# EAGLE board electrical_diagram_pcb (EAGLE 9.7.0)
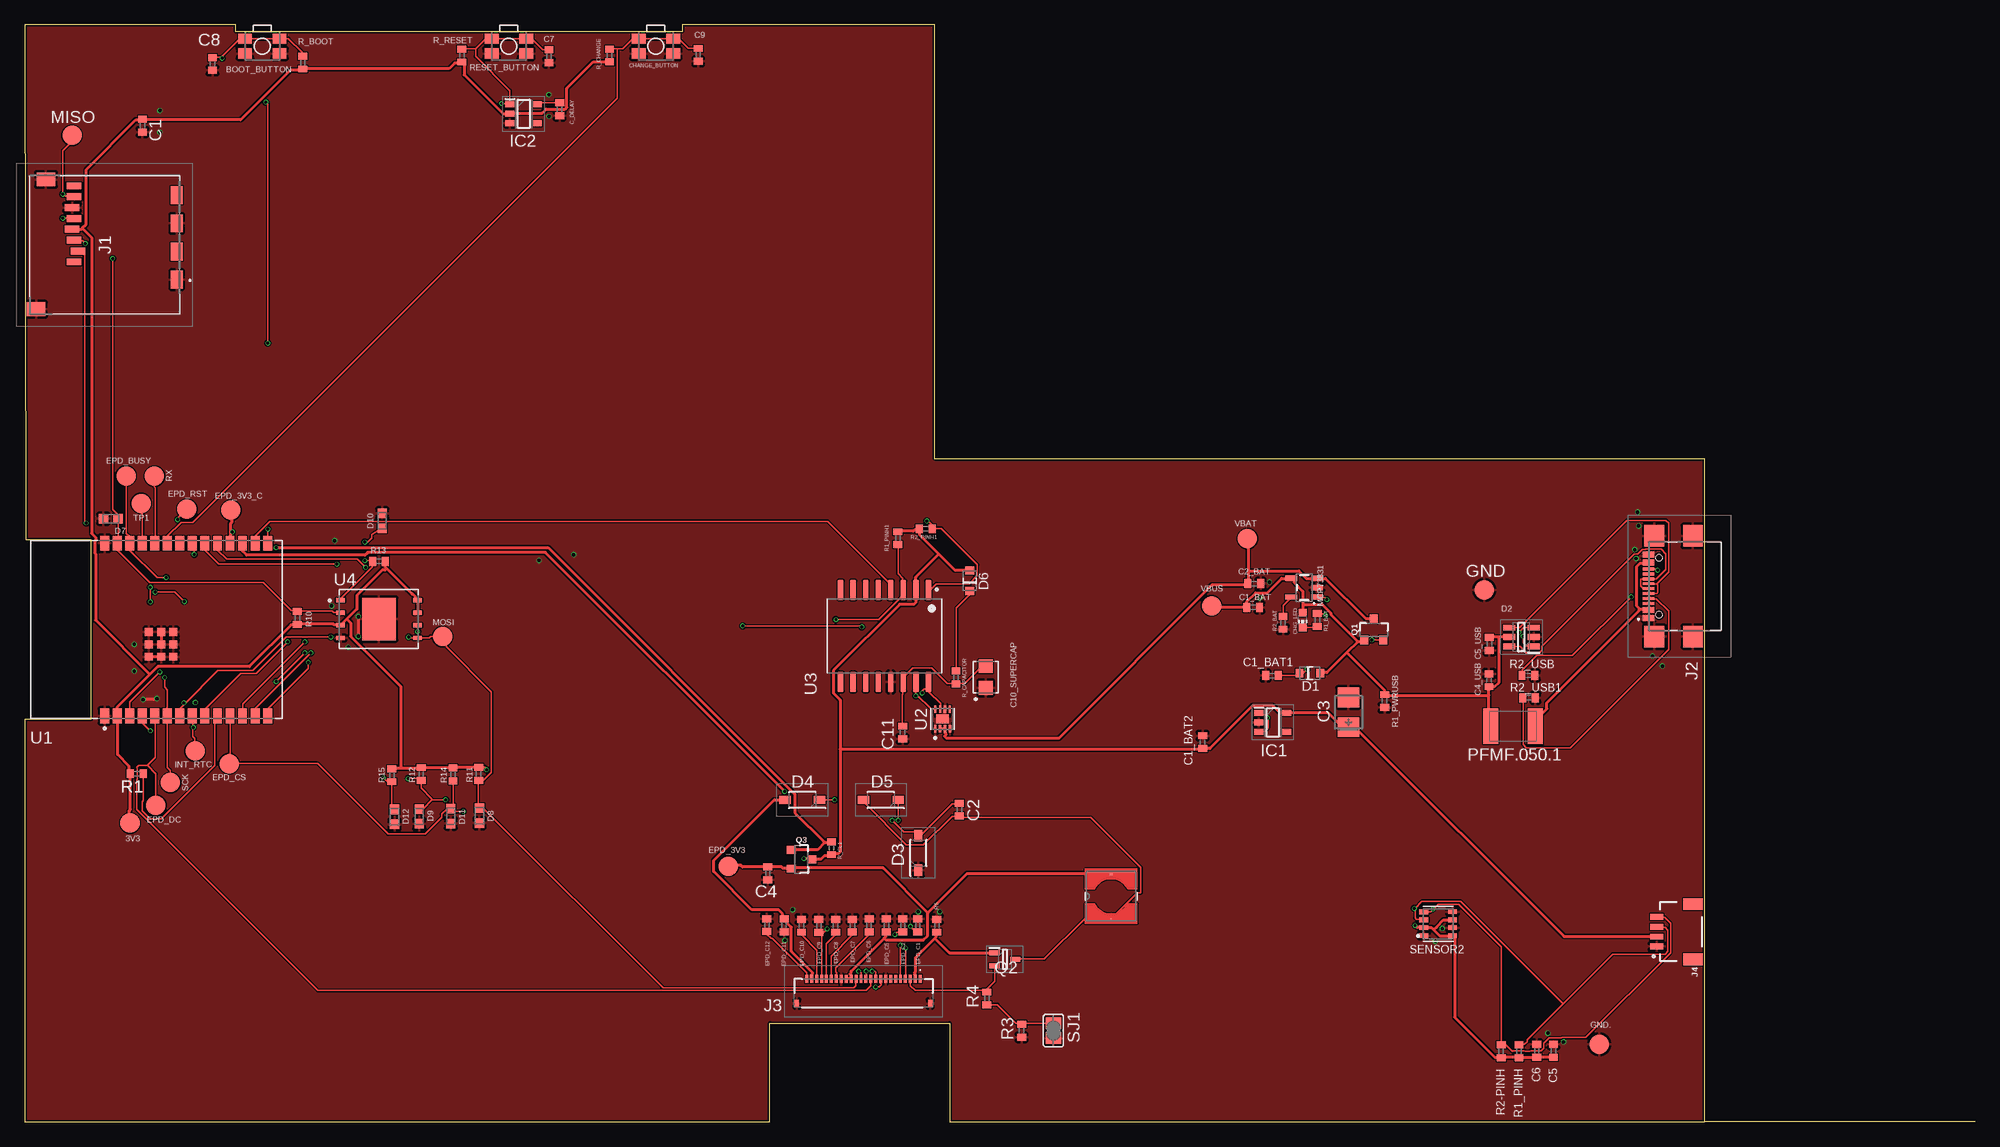
[diagram p0: board, top side]
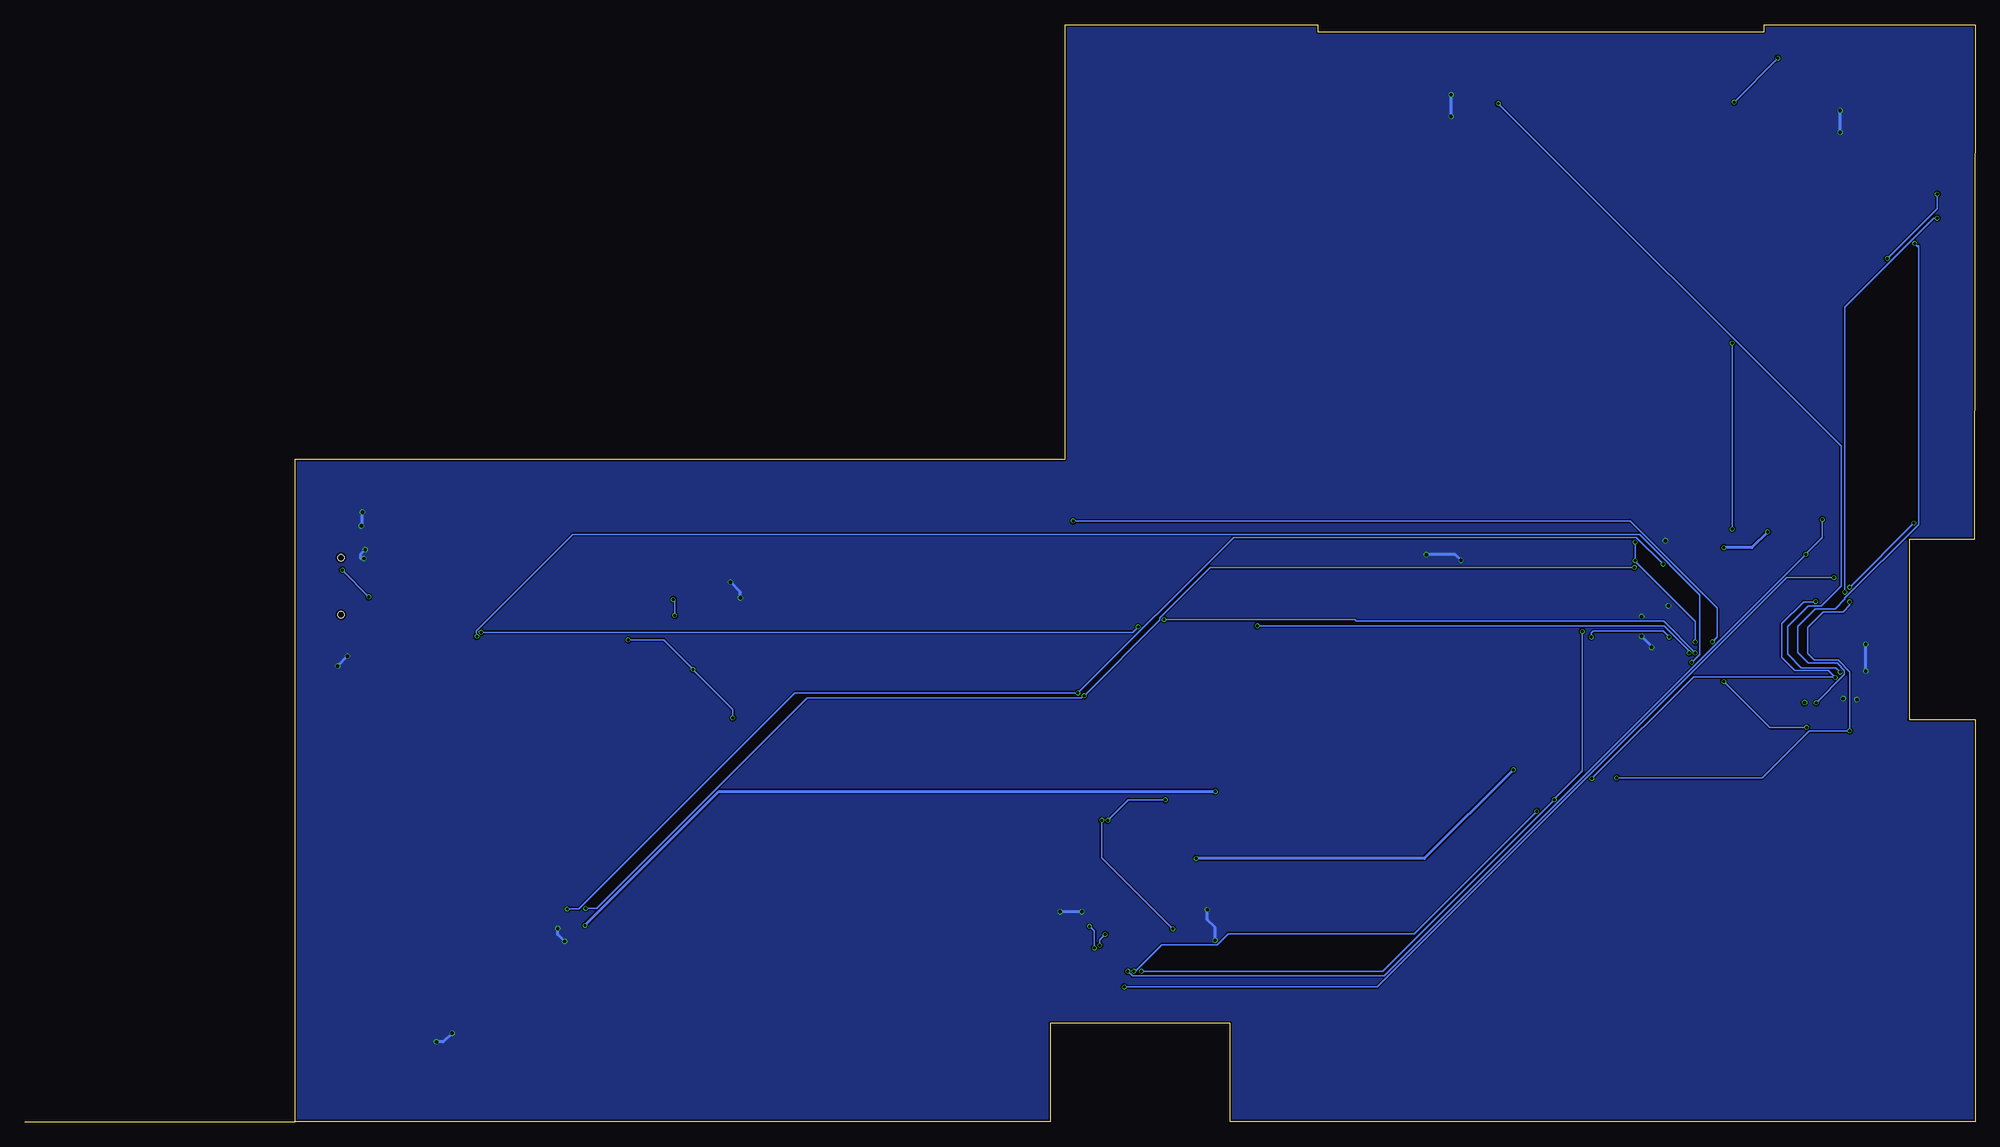
[diagram p1: board, bottom side, seen from below]

Size 197.6 x 111.2 mm. Coordinates in mm from the lower left corner, seen from the top.
Outline: 170.2,0 93.7,0 93.7,10 75.5,10 75.5,0 0,0 0,40.8 6.7,40.8 6.7,59 0.1,59 0,111.2 21.4,111.2 21.4,110.5 66.6,110.5 66.6,111.2 92.2,111.2 92.2,67.2 170.2,67.2 170.2,0
Outline: 197.6,0 170.2,0
Copper layers (1*16): Top 0.035mm / dielectric 1.6mm / Bottom 0.035mm
Design rules "jlcpcb-2layers.dru": minimum track width 0.15mm, minimum drill 0.3mm, track to track 5mil, track to pad 5mil, pad to pad 5mil, via to via 5mil, smd to smd 5mil, copper to edge 0.2mm, drill to drill 6mil, minimum pad ring 10mil, minimum via ring 3mil, stop-mask expansion 4mil, vias tented up to drill 0mil, thermal gap 10mil
Net classes: 1 0.3mm: width 0.3 mm

## Footprints (pad centres in the part's own frame; a part is rotated, then mirrored left to right if it is on the bottom)
TP20R = smd 2 x 2: TP 0,0
MYBUTTON = smd 1.4 x 1.05: 1 1.75,0.75; 2 -1.75,0.75; 3 -1.75,-0.75; 4 1.75,-0.75
EAGLE-LTSPICE_C0402 = smd 0.7 x 0.9: 1 -0.65,0; 2 0.65,0
RCL_CT3528 = smd 2 x 2.2: + -1.5,0; - 1.5,0
ESP32_WROVER_EAGLE-LTSPICE_C0402 = smd 0.7 x 0.9: 1 -0.65,0; 2 0.65,0
CAPCP3225X100N = smd 1.4 x 1.4: 1 -1.1,0; 2 1.1,0
ADAFRUIT_CHIP-LED0603 = smd 0.8 x 0.8: A 0,-0.75; C 0,0.75
ESP32_WROVER_AVX---SD0805S020S1R0_AVX_SD0805S020S1R0_0 = smd 0.8 x 0.9: 1 -1.05,0; 2 1.05,0
SOT95P280X145-6N = smd 1.2 x 0.6: 1 -1.25,0.95; 2 -1.25,0; 3 -1.25,-0.95; 4 1.25,-0.95; 5 1.25,0; 6 1.25,0.95
SOD3716X135N = smd 1.15 x 0.8: 1 -1.75,0; 2 1.75,0
DIOC1608X36N = smd 0.97 x 0.94: 1 -0.75,0; 2 0.75,0
SOT95P280X120-5N = smd 0.9 x 0.6: 1 -1.4,0.95; 2 -1.4,0; 3 -1.4,-0.95; 4 1.4,-0.95; 5 1.4,0.95
SOT95P280X125-5N = smd 0.9 x 0.6: 1 -1.4,0.95; 2 -1.4,0; 3 -1.4,-0.95; 4 1.4,-0.95; 5 1.4,0.95
112ATAARR03ATTEND = smd 1.8 x 1.2: G1 10.6,10.4; G2 4.9,10.4; S1 7.75,10.4; S2 2.05,10.4 | smd 1.4 x 1.9: G3 13.6,-3.85; G4 0.45,-2.85 | smd 0.7 x 1.5: P1 8.8,0; P2 7.7,0.4; P3 6.6,0; P4 5.5,-0.2; P5 4.4,0; P6 3.3,-0.2; P7 2.2,0; P8 1.1,0
SAMACSYS_PARTS_USB4110GFA = smd 0.3 x 1.15: A1 -3.35,3.678; A4 -2.55,3.678; A5 -1.25,3.678; A6 -0.25,3.678; A7 0.25,3.678; A8 1.25,3.678; A9 2.55,3.678; A12 3.35,3.678; B1 3.05,3.678; B4 2.25,3.678; B5 1.75,3.678; B6 0.75,3.678; B7 -0.75,3.678; B8 -1.75,3.678; B9 -2.25,3.678; B12 -3.05,3.678 | smd 2.18 x 2: MP1 -5.11,-0.827; MP2 5.11,-0.827; MP3 -5.11,3.103; MP4 5.11,3.103 | hole 0.65: -2.89,2.603; 2.89,2.603
FH34SRJ24S05SH99 = smd 0.3 x 0.8: 1 5.75,1.45; 2 5.25,1.45; 3 4.75,1.45; 4 4.25,1.45; 5 3.75,1.45; 6 3.25,1.45; 7 2.75,1.45; 8 2.25,1.45; 9 1.75,1.45; 10 1.25,1.45; 11 0.75,1.45; 12 0.25,1.45; 13 -0.25,1.45; 14 -0.75,1.45; 15 -1.25,1.45; 16 -1.75,1.45; 17 -2.25,1.45; 18 -2.75,1.45; 19 -3.25,1.45; 20 -3.75,1.45; 21 -4.25,1.45; 22 -4.75,1.45; 23 -5.25,1.45; 24 -5.75,1.45 | smd 0.4 x 0.8: MP1 6.75,-1.05; MP2 -6.75,-1.05
JST04_1MM_RA = smd 0.6 x 1.35: 1 -1.5,0; 2 -0.5,0; 3 0.5,0; 4 1.5,0 | smd 1.2 x 2: NC1 2.8,-3.675; NC2 -2.8,-3.675
IND_4828-WE-TPC_WRE = smd 0.127 x 0.127: 1 -2.286,0 | smd 0.305 x 0.305: 2 2.286,0
ESP32_WROVER_SPARKFUN-IC-POWER_SOT23-5 = smd 0.55 x 1.2: 1 -0.95,-1.3; 2 0,-1.3; 3 0.95,-1.3; 4 0.95,1.3; 5 -0.95,1.3
ESP32C6_VARISTOR_CT/CN1812 = smd 1.5 x 3.6: 1 -2.25,0; 2 2.25,0
ESP32_WROVER_SPARKFUN-DISCRETESEMI_SOT23-3 = smd 0.8 x 0.9: 1 -0.95,-1; 2 0.95,-1; 3 0,1.1
SOT65P210X110-3N = smd 1.05 x 0.5: 1 -1.05,0.65; 2 -1.05,-0.65; 3 1.05,0
ESP32_WROVER_EAGLE-LTSPICE_R0402 = smd 0.7 x 0.9: 1 -0.65,0; 2 0.65,0
ESP32_WROVER_BME680_PSON80P300X300X100-8N = smd 1.016 x 0.5: 1 1.458,1.2; 2 1.458,0.4; 3 1.458,-0.4; 4 1.458,-1.2; 5 -1.458,-1.22; 6 -1.458,-0.4; 7 -1.458,0.4; 8 -1.458,1.2
SJ = smd 1.168 x 1.6: 1 -0.762,0; 2 0.762,0
XCVR_ESP32-C6-WROOM-1-N8 = smd 1.5 x 0.9: 1 -8.75,5.26; 2 -8.75,3.99; 3 -8.75,2.72; 4 -8.75,1.45; 5 -8.75,0.18; 6 -8.75,-1.09; 7 -8.75,-2.36; 8 -8.75,-3.63; 9 -8.75,-4.9; 10 -8.75,-6.17; 11 -8.75,-7.44; 12 -8.75,-8.71; 13 -8.75,-9.98; 14 -8.75,-11.25; 15 8.75,-11.25; 16 8.75,-9.98; 17 8.75,-8.71; 18 8.75,-7.44; 19 8.75,-6.17; 20 8.75,-4.9; 21 8.75,-3.63; 22 8.75,-2.36; 23 8.75,-1.09; 24 8.75,0.18; 25 8.75,1.45; 26 8.75,2.72; 27 8.75,3.99; 28 8.75,5.26 | smd 0.8 x 0.8: 29_1 -2.755,0.79; 29_2 -1.505,0.79; 29_3 -0.255,0.79; 29_4 -2.755,-0.46; 29_5 -1.505,-0.46; 29_6 -0.255,-0.46; 29_7 -2.755,-1.71; 29_8 -1.505,-1.71; 29_9 -0.255,-1.71
SON50P200X200X80-9N = smd 0.76 x 0.305: 1 -0.985,0.75; 2 -0.985,0.25; 3 -0.985,-0.25; 4 -0.985,-0.75; 6 0.985,-0.25 | smd 0.76 x 0.27: 5 0.985,-0.75; 7 0.985,0.25; 8 0.985,0.75 | smd 0.9 x 1.3: 9 0,0
SOIC127P1032X265-16N = smd 2.05 x 0.59: 1 -4.655,4.445; 2 -4.655,3.175; 3 -4.655,1.905; 4 -4.655,0.635; 5 -4.655,-0.635; 6 -4.655,-1.905; 7 -4.655,-3.175; 8 -4.655,-4.445; 9 4.655,-4.445; 10 4.655,-3.175; 11 4.655,-1.905; 12 4.655,-0.635; 13 4.655,0.635; 14 4.655,1.905; 15 4.655,3.175; 16 4.655,4.445
SON127P600X800X80-9N = smd 0.94 x 0.44: 1 -3.895,1.905; 2 -3.895,0.635; 3 -3.895,-0.635; 4 -3.895,-1.905; 5 3.895,-1.905; 6 3.895,-0.635; 7 3.895,0.635; 8 3.895,1.905 | smd 3.4 x 4.3: 9 0,0

## Placement (x,y rotation side)
3V3  TP  [TP20R]  10.67,30.29 180 top
BOOT_BUTTON  BUTTON_CUSYOMV1  [MYBUTTON]  24.07,109.03 180 top
C1  100nF  [EAGLE-LTSPICE_C0402]  11.93,100.96 270 top
C1_BAT  4.7uF  [EAGLE-LTSPICE_C0402]  124.44,52.15 0 top
C1_BAT1  4.7uF  [EAGLE-LTSPICE_C0402]  126.35,45.23 180 top
C1_BAT2  4.7uF  [EAGLE-LTSPICE_C0402]  119.33,38.49 90 top
C2  4.7uF/25V  [EAGLE-LTSPICE_C0402]  94.69,31.65 270 top
C2_BAT  4.7uF  [EAGLE-LTSPICE_C0402]  124.55,54.55 0 top
C3  100uF TANT  [RCL_CT3528]  134.1,41.51 90 top
C4  10uF  [EAGLE-LTSPICE_C0402]  75.27,25.19 90 top
C4_USB  100nF  [EAGLE-LTSPICE_C0402]  148.33,44.76 90 top
C5  100nF  [ESP32_WROVER_EAGLE-LTSPICE_C0402]  154.87,7.22 90 top
C5_USB  4.7uF  [EAGLE-LTSPICE_C0402]  148.37,48.43 270 top
C6  100nF  [ESP32_WROVER_EAGLE-LTSPICE_C0402]  153.17,7.2 90 top
C7  1uF  [ESP32_WROVER_EAGLE-LTSPICE_C0402]  53.11,108.01 270 top
C8  100nF  [ESP32_WROVER_EAGLE-LTSPICE_C0402]  19.03,107.22 270 top
C9  100nF  [ESP32_WROVER_EAGLE-LTSPICE_C0402]  68.23,108.14 270 top
C10_SUPERCAP  CPH3225A  [CAPCP3225X100N]  97.36,45.09 90 top
C11  100nF  [ESP32_WROVER_EAGLE-LTSPICE_C0402]  88.93,39.46 270 top
C_DELAY  100nF  [ESP32_WROVER_EAGLE-LTSPICE_C0402]  54.19,102.63 270 top
CHANGE_BUTTON  BUTTON_CUSYOMV1  [MYBUTTON]  63.94,109.03 180 top
CHG_LED  LED  [ADAFRUIT_CHIP-LED0603]  129.46,50.85 180 top
D1  ESP32_WROVER_AVX---SD0805S020S1R0_AVX_SD0805S020S1R0_0_0AVX_SD0805S020S1R0_0_0  [ESP32_WROVER_AVX---SD0805S020S1R0_AVX_SD0805S020S1R0_0]  130.19,45.48 0 top
D2  USBLC6-2SC6Y  [SOT95P280X145-6N]  151.62,49.13 180 top
D3  MBR0530  [SOD3716X135N]  90.53,27.26 90 top
D4  MBR0530  [SOD3716X135N]  78.78,32.62 180 top
D5  MBR0530  [SOD3716X135N]  86.74,32.62 180 top
D6  ESP32_WROVER_AVX---SD0805S020S1R0_AVX_SD0805S020S1R0_0_0AVX_SD0805S020S1R0_0_0  [ESP32_WROVER_AVX---SD0805S020S1R0_AVX_SD0805S020S1R0_0]  95.72,54.84 90 top
D7  PGB1010603MR  [DIOC1608X36N]  8.72,61.13 180 top
D8  PGB1010603MR  [DIOC1608X36N]  46.07,31.04 270 top
D9  PGB1010603MR  [DIOC1608X36N]  39.97,30.96 270 top
D10  PGB1010603MR  [DIOC1608X36N]  36.23,60.92 90 top
D11  PGB1010603MR  [DIOC1608X36N]  43.17,31 270 top
D12  PGB1010603MR  [DIOC1608X36N]  37.47,30.92 270 top
EPD_3V3  TP  [TP20R]  71.28,25.91 0 top
EPD_3V3_C  TP  [TP20R]  20.88,62.01 0 top
EPD_BUSY  TP  [TP20R]  10.27,65.46 0 top
EPD_C1  1uF/50V  [EAGLE-LTSPICE_C0402]  90.47,19.92 270 top
EPD_C2  1uF/50V  [EAGLE-LTSPICE_C0402]  88.95,19.92 270 top
EPD_C5  0.1uF/50V  [EAGLE-LTSPICE_C0402]  87.29,19.91 270 top
EPD_C6  1uF/50V  [EAGLE-LTSPICE_C0402]  85.55,19.91 270 top
EPD_C7  1uF/50V  [EAGLE-LTSPICE_C0402]  83.85,19.9 270 top
EPD_C8  1uF/50V  [EAGLE-LTSPICE_C0402]  82.15,19.89 270 top
EPD_C9  1uF/50V  [EAGLE-LTSPICE_C0402]  80.45,19.88 270 top
EPD_C10  1uF/50V  [EAGLE-LTSPICE_C0402]  78.69,19.89 270 top
EPD_C11  1uF/50V  [EAGLE-LTSPICE_C0402]  76.93,19.91 90 top
EPD_C12  1uF/50V  [EAGLE-LTSPICE_C0402]  75.19,19.95 270 top
EPD_CS  TP  [TP20R]  20.72,36.29 180 top
EPD_DC  TP  [TP20R]  13.29,32.09 0 top
EPD_RST  TP  [TP20R]  16.43,62.11 0 top
GND  TP  [TP20R]  147.87,53.89 0 top
GND.  TP  [TP20R]  159.49,7.89 0 top
IC1  XC6220A331MR-G  [SOT95P280X120-5N]  126.43,40.49 0 top
IC2  BD5229G-TR  [SOT95P280X125-5N]  50.55,102.17 0 top
INT_RTC  TP  [TP20R]  17.27,37.59 180 top
J1  112A-TAAR-R03_ATTEND  [112ATAARR03ATTEND]  5,95.96 270 top
J2  SAMACSYS_PARTS_USB4110-GF-A  [SAMACSYS_PARTS_USB4110GFA]  168.17,54.29 90 top
J3  FH34SRJ-24S-0.5SH_99_  [FH34SRJ24S05SH99]  84.97,13.04 0 top
J4  QWIIC_RIGHT_ANGLE  [JST04_1MM_RA]  165.33,19.28 90 top
L1  68uH  [IND_4828-WE-TPC_WRE]  110.05,22.87 90 top
MCP73831  ESP32_WROVER_SPARKFUN-IC-POWER_MCP73831  [ESP32_WROVER_SPARKFUN-IC-POWER_SOT23-5]  129.61,54.15 90 top
MISO  TP  [TP20R]  4.81,99.99 0 top
MOSI  TP  [TP20R]  42.33,49.19 0 top
PFMF.050.1  ESP32C6_VARISTORCN1812  [ESP32C6_VARISTOR_CT/CN1812]  150.76,40.1 180 top
Q1  20V/4.2A/52mΩ/1.4W  [ESP32_WROVER_SPARKFUN-DISCRETESEMI_SOT23-3]  136.66,49.86 0 top
Q2  SI1308EDL-T1-GE3  [SOT65P210X110-3N]  99.29,16.48 0 top
Q3  20V/4.2A/52mΩ/1.4W  [ESP32_WROVER_SPARKFUN-DISCRETESEMI_SOT23-3]  78.66,26.62 270 top
R1  10K  [ESP32_WROVER_EAGLE-LTSPICE_R0402]  11.35,35.29 180 top
R1_BAT  200  [ESP32_WROVER_EAGLE-LTSPICE_R0402]  130.95,50.86 90 top
R1_PINH  10k  [ESP32_WROVER_EAGLE-LTSPICE_R0402]  151.37,7.17 270 top
R1_PINH1  10k  [ESP32_WROVER_EAGLE-LTSPICE_R0402]  88.46,59.16 90 top
R1_PWRUSB  100k  [ESP32_WROVER_EAGLE-LTSPICE_R0402]  137.76,42.65 90 top
R2-PINH  10k  [ESP32_WROVER_EAGLE-LTSPICE_R0402]  149.57,7.15 270 top
R2_BAT  2K  [ESP32_WROVER_EAGLE-LTSPICE_R0402]  127.47,50.58 90 top
R2_PINH1  10k  [ESP32_WROVER_EAGLE-LTSPICE_R0402]  91.29,60.11 180 top
R2_USB  5k1  [ESP32_WROVER_EAGLE-LTSPICE_R0402]  152.33,45.25 0 top
R2_USB1  5k1  [ESP32_WROVER_EAGLE-LTSPICE_R0402]  152.39,42.98 0 top
R3  2.2  [ESP32_WROVER_EAGLE-LTSPICE_R0402]  100.99,9.23 90 top
R4  0.47  [ESP32_WROVER_EAGLE-LTSPICE_R0402]  97.47,12.51 90 top
R5  10k  [ESP32_WROVER_EAGLE-LTSPICE_R0402]  92.41,19.89 270 top
R10  10k  [ESP32_WROVER_EAGLE-LTSPICE_R0402]  27.63,51.07 270 top
R11  10k  [ESP32_WROVER_EAGLE-LTSPICE_R0402]  45.99,35.27 90 top
R12  10k  [ESP32_WROVER_EAGLE-LTSPICE_R0402]  40.17,35.25 90 top
R13  10k  [ESP32_WROVER_EAGLE-LTSPICE_R0402]  35.89,56.81 0 top
R14  10k  [ESP32_WROVER_EAGLE-LTSPICE_R0402]  43.39,35.21 90 top
R15  10k  [ESP32_WROVER_EAGLE-LTSPICE_R0402]  37.19,35.13 90 top
R_BOOT  10k  [ESP32_WROVER_EAGLE-LTSPICE_R0402]  28.17,107.36 270 top
R_CAPACITOR  15  [ESP32_WROVER_EAGLE-LTSPICE_R0402]  94.34,45.05 270 top
R_CHANGE  10k  [ESP32_WROVER_EAGLE-LTSPICE_R0402]  59.24,108.08 270 top
R_CL1  10k  [ESP32_WROVER_EAGLE-LTSPICE_R0402]  81.73,27.74 270 top
R_RESET  10k  [ESP32_WROVER_EAGLE-LTSPICE_R0402]  44.29,108.07 270 top
RESET_BUTTON  BUTTON_CUSYOMV1  [MYBUTTON]  49.05,109.03 180 top
RX  TP  [TP20R]  13.13,65.44 0 top
SCK  TP  [TP20R]  14.75,34.39 0 top
SENSOR2  BME680  [ESP32_WROVER_BME680_PSON80P300X300X100-8N]  143.19,20.08 180 top
SJ1  -  [SJ]  104.21,9.26 90 top
TP1  TP  [TP20R]  11.79,62.69 180 top
U1  ESP32-C6-WROOM-1-N8  [XCVR_ESP32-C6-WROOM-1-N8]  13.36,49.9 90 top
U2  MAX17048G+T10  [SON50P200X200X80-9N]  92.98,40.84 90 top
U3  DS3231SN#  [SOIC127P1032X265-16N]  87.1,49.25 270 top
U4  W25Q512JVEIQ  [SON127P600X800X80-9N]  35.89,50.96 0 top
VBAT  TP  [TP20R]  123.85,59.11 180 top
VBUS  TP  [TP20R]  120.23,52.31 0 top

## Library data of the parts
3V3 BOOT_BUTTON C1 C1_BAT C1_BAT1 C1_BAT2 C2 C2_BAT C4 C4_USB C5_USB CHANGE_BUTTON CHG_LED EPD_3V3 EPD_3V3_C EPD_BUSY EPD_C1 EPD_C2 EPD_C5-EPD_C12 EPD_CS EPD_DC EPD_RST GND GND. INT_RTC MISO MOSI PFMF.050.1 R1 R1_BAT R1_PINH R1_PINH1 R1_PWRUSB R2-PINH R2_BAT R2_PINH1 R2_USB R2_USB1 R3-R5 R10-R15 R_BOOT R_CAPACITOR R_CHANGE R_CL1 R_RESET RESET_BUTTON RX SCK SJ1 TP1 VBAT VBUS = DeskAssistant v19 v1
C3 = DeskAssistant v19 v1; SPICEPREFIX: C
C5-C9 C11 C_DELAY = DeskAssistant v19 v1; SPICEMODEL: NONE; SPICEPREFIX: C
C10_SUPERCAP = DeskAssistant v19 v1; AVAILABILITY: Not in stock; CHECK_PRICES: https://www.snapeda.com/parts/CPH3225A/Seiko+Instruments/view-part/?ref=eda; DESCRIPTION: 11 mF (EDLC) Supercapacitor 3.3 V 1210 (3225 Metric) - -; MF: Seiko Instruments; MP: CPH3225A; PACKAGE: 1210 Seiko; PRICE: None; PURCHASE-URL: https://www.snapeda.com/api/url_track_click_mouser/?unipart_id=562593&manufacturer=Seiko Instruments&part_name=CPH3225A&search_term=None; SNAPEDA_LINK: https://www.snapeda.com/parts/CPH3225A/Seiko+Instruments/view-part/?ref=snap
D1 D6 = DeskAssistant v19 v1; CENTROID_NOT_SPECIFIED: No; DATASHEET: http://datasheets.avx.com/schottky.pdf; DIGIKEY_DESCRIPTION: DIODE SCHOTTKY 20V 1A 0805; DIGIKEY_PART_NUMBER: 478-7800-1-ND; LEAD_FREE: yes; MF: AVX; MOUSER_PART_NUMBER: 581-SD0805S020S1R0; PACKAGE: 0805 (2012 metric); PREFIX: D; ROHS: yes; TEMPERATURE_RANGE_HIGH: +125°C; TEMPERATURE_RANGE_LOW: -55°C
D2 = DeskAssistant v19 v1; AVAILABILITY: In Stock; CHECK_PRICES: https://www.snapeda.com/parts/USBLC6-2SC6Y/STMicroelectronics/view-part/?ref=eda; DESCRIPTION: 17V Clamp 5A (8/20µs) Ipp Tvs Diode Surface Mount SOT-23-6; MF: STMicroelectronics; MP: USBLC6-2SC6Y; PACKAGE: SOT-23-6 STMicroelectronics; PRICE: None; SNAPEDA_LINK: https://www.snapeda.com/parts/USBLC6-2SC6Y/STMicroelectronics/view-part/?ref=snap
D3-D5 = DeskAssistant v19 v1; AVAILABILITY: In Stock; CHECK_PRICES: https://www.snapeda.com/parts/MBR0530/Onsemi/view-part/?ref=eda; DESCRIPTION: Diode Schottky 30 V 500mA Surface Mount SOD-123; MF: ON Semiconductor; MP: MBR0530; PACKAGE: SOD-123-2 ON Semiconductor; PRICE: None; PURCHASE-URL: https://www.snapeda.com/api/url_track_click_mouser/?unipart_id=179458&manufacturer=ON Semiconductor&part_name=MBR0530&search_term=None; SNAPEDA_LINK: https://www.snapeda.com/parts/MBR0530/Onsemi/view-part/?ref=snap
D7-D12 = DeskAssistant v19 v1; AVAILABILITY: In Stock; CHECK_PRICES: https://www.snapeda.com/parts/PGB1010603MR/Littelfuse/view-part/?ref=eda; DESCRIPTION: 150V (Typ) Clamp - Ipp Tvs Diode Surface Mount 0603 (1608 Metric); MF: Littelfuse Inc.; MP: PGB1010603MR; PACKAGE: 0603 Littelfuse Inc.; PRICE: None; PURCHASE-URL: https://www.snapeda.com/api/url_track_click_mouser/?unipart_id=5659453&manufacturer=Littelfuse Inc.&part_name=PGB1010603MR&search_term=None; SNAPEDA_LINK: https://www.snapeda.com/parts/PGB1010603MR/Littelfuse/view-part/?ref=snap
IC1 = DeskAssistant v19 v1; DESCRIPTION: LDO Voltage Regulators; HEIGHT: 1.2mm; MANUFACTURER_NAME: Torex; MANUFACTURER_PART_NUMBER: XC6220A331MR-G; MOUSER_PART_NUMBER: 865-XC6220A331MR-G; MOUSER_PRICE-STOCK: https://www.mouser.co.uk/ProductDetail/Torex-Semiconductor/XC6220A331MR-G?qs=AsjdqWjXhJ8ZSWznL1J0gg%3D%3D
IC2 = DeskAssistant v19 v1; DESCRIPTION: Voltage Detector with Adjustable Delay Time: CMOS processes are utilized to develop high precision, low current consumption CMOS reset ICs that allow arbitrary setting of the delay time. The extensive lineup includes both Nch Open Drain and CMOS output types in a wide range of detection voltages (from 2.3V to 6.0V, in 0.1V steps), enabling selection of the ideal solution based on customer requirements. In addition, the entire series is of course both lead-free and RoHS-compliant.; HEIGHT: 1.25mm; MANUFACTURER_NAME: ROHM Semiconductor; MANUFACTURER_PART_NUMBER: BD5229G-TR; MOUSER_PART_NUMBER: 755-BD5229G-TR; MOUSER_PRICE-STOCK: https://www.mouser.co.uk/ProductDetail/ROHM-Semiconductor/BD5229G-TR?qs=4kLU8WoGk0vvnhrrYwdszw%3D%3D
J1 = DeskAssistant v19 v1; DESCRIPTION: Micro SD Card Socket, Push-Push Type, Top Mount, SMT, H=1.83mm, 10u; HEIGHT: 1.9mm; MANUFACTURER_NAME: ATTEND; MANUFACTURER_PART_NUMBER: 112A-TAAR-R03 ATTEND
J2 = DeskAssistant v19 v1; DESCRIPTION: CONN USB 2.0 TYPE-C R/A SMT; HEIGHT: 3.26mm; MANUFACTURER_NAME: GCT (GLOBAL CONNECTOR TECHNOLOGY); MANUFACTURER_PART_NUMBER: USB4110-GF-A; MOUSER_PART_NUMBER: 640-USB4110-GF-A; MOUSER_PRICE-STOCK: https://www.mouser.co.uk/ProductDetail/GCT/USB4110-GF-A?qs=KUoIvG%2F9IlYiZvIXQjyJeA%3D%3D
J3 = DeskAssistant v19 v1; DESCRIPTION: 24 Position FFC, FPC Connector Contacts, Top and Bottom 0.020" (0.50mm) Surface Mount, Right Angle; HEIGHT: 1.1mm; MANUFACTURER_NAME: Hirose; MANUFACTURER_PART_NUMBER: FH34SRJ-24S-0.5SH(99); MOUSER_PART_NUMBER: 798-FH34SRJ24S05SH99; MOUSER_PRICE-STOCK: https://www.mouser.co.uk/ProductDetail/Hirose-Connector/FH34SRJ-24S-0.5SH99?qs=vcbW%252B4%252BSTIpKBl5ap9J8Fw%3D%3D
J4 = DeskAssistant v19 v1; PROD_ID: CONN-13694
L1 = DeskAssistant v19 v1; COPYRIGHT: Copyright (C) 2024 Ultra Librarian. All rights reserved.; MANUFACTURER_PART_NUMBER: 744043680; MFR_NAME: Wurth Electronics
MCP73831 = DeskAssistant v19 v1; PROD_ID: IC-09995
Q1 Q3 = DeskAssistant v19 v1; PROD_ID: TRAN-14388
Q2 = DeskAssistant v19 v1; AVAILABILITY: In Stock; CHECK_PRICES: https://www.snapeda.com/parts/SI1308EDL-T1-GE3/Vishay+Siliconix/view-part/?ref=eda; DESCRIPTION: Si1308EDL-T1-GE3 N-channel MOSFET Transistor, 1.5 A, 30 V, 3-Pin SC-70 | Siliconix / Vishay SI1308EDL-T1-GE3; MF: Vishay Siliconix; MP: SI1308EDL-T1-GE3; PACKAGE: SOT-323 Vishay Semiconductor; PRICE: None; PURCHASE-URL: https://www.snapeda.com/api/url_track_click_mouser/?unipart_id=274603&manufacturer=Vishay Siliconix&part_name=SI1308EDL-T1-GE3&search_term=None; SNAPEDA_LINK: https://www.snapeda.com/parts/SI1308EDL-T1-GE3/Vishay+Siliconix/view-part/?ref=snap
SENSOR2 = DeskAssistant v19 v1; AVAILABILITY: Unavailable; DESCRIPTION: Integrated Environmental Unit; MF: Bosch Sensortec; MP: BME680; PACKAGE: LGA-8 Bosch Tools; PRICE: None
U1 = DeskAssistant v19 v1; AVAILABILITY: In Stock; CHECK_PRICES: https://www.snapeda.com/parts/ESP32-C6-WROOM-1-N8/Espressif+Systems/view-part/?ref=eda; DESCRIPTION: Multiprotocol Modules ESP32-C6 module, Wi-Fi 6 in 2.4 GHz band, Bluetooth 5, Zigbee 3.0 and Thread. ESP34-WROOM Compatible - ENGINEERING SAMPLE; MF: Espressif Systems; MP: ESP32-C6-WROOM-1-N8; PACKAGE: None; PRICE: None; SNAPEDA_LINK: https://www.snapeda.com/parts/ESP32-C6-WROOM-1-N8/Espressif+Systems/view-part/?ref=snap
U2 = DeskAssistant v19 v1; AVAILABILITY: In Stock; CHECK_PRICES: https://www.snapeda.com/parts/MAX17048G+T10/Analog+Devices/view-part/?ref=eda; DESCRIPTION: 3µA 1-Cell/2-Cell Fuel Gauge with ModelGauge; MF: Analog Devices; MP: MAX17048G+T10; PACKAGE: TDFN-8 Maxim; PRICE: None; PURCHASE-URL: https://www.snapeda.com/api/url_track_click_mouser/?unipart_id=329239&manufacturer=Analog Devices&part_name=MAX17048G+T10&search_term=None; SNAPEDA_LINK: https://www.snapeda.com/parts/MAX17048G+T10/Analog+Devices/view-part/?ref=snap
U3 = DeskAssistant v19 v1; AVAILABILITY: In Stock; CHECK_PRICES: https://www.snapeda.com/parts/DS3231SN%23/Analog+Devices/view-part/?ref=eda; DESCRIPTION: Extremely Accurate I²C-Integrated RTC/TCXO/Crystal; MF: Analog Devices; MP: DS3231SN#; PACKAGE: SOIC-16 Maxim; PRICE: None; PURCHASE-URL: https://www.snapeda.com/api/url_track_click_mouser/?unipart_id=99048&manufacturer=Analog Devices&part_name=DS3231SN#&search_term=None; SNAPEDA_LINK: https://www.snapeda.com/parts/DS3231SN%23/Analog+Devices/view-part/?ref=snap
U4 = DeskAssistant v19 v1; AVAILABILITY: In Stock; CHECK_PRICES: https://www.snapeda.com/parts/W25Q512JVEIQ/Winbond+Electronics/view-part/?ref=eda; DESCRIPTION: FLASH - NOR Memory IC 512Mb (64M x 8) SPI - Quad I/O 133 MHz 8-WSON (8x6); MF: Winbond Electronics; MP: W25Q512JVEIQ; PACKAGE: Package; PRICE: None; SNAPEDA_LINK: https://www.snapeda.com/parts/W25Q512JVEIQ/Winbond+Electronics/view-part/?ref=snap

## Nets
3V3 [0.3mm]: 3V3.TP C1.1 C1_BAT2.1 C3.+ D6.2 IC1.5 IC2.2 J1.P4 J4.2 Q3.3 R1.2 R1_PINH1.2 R2_PINH1.2 R10.2 R11.2 R12.2 R13.2 R14.2 R15.2 R_BOOT.2 R_CHANGE.2 R_CL1.2 R_RESET.2 U1.2 U3.2 U4.3 U4.7 U4.8
32KHZ: R2_PINH1.1 U1.9 U3.1
DN: D2.4 J2.A7 J2.B7
DP: D2.6 J2.A6 J2.B6
EPD_3V3 [0.3mm]: C4.2 EPD_3V3.TP EPD_C5.2 J3.15 J3.16 L1.2 Q3.2
EPD_3V3_C [0.3mm]: EPD_3V3_C.TP Q3.1 R_CL1.1 U1.18
EPD_BUSY: EPD_BUSY.TP J3.9 U1.26
EPD_CS: D11.1 EPD_CS.TP J3.12 R14.1 U1.11
EPD_DC: EPD_DC.TP J3.11 U1.5
EPD_RST: EPD_RST.TP J3.10 U1.21
FLASH_CS: D10.1 R13.1 U1.12 U4.1
GDR [0.3mm]: J3.2 Q2.1 R5.2
GND [0.3mm]: BOOT_BUTTON.1 BOOT_BUTTON.2 C1.2 C1_BAT1.2 C1_BAT2.2 C1_BAT.2 C2_BAT.2 C3.- C4.1 C4_USB.2 C5.2 C5_USB.2 C6.2 C7.2 C8.2 C9.2 C10_SUPERCAP.1 C11.2 C_DELAY.2 CHANGE_BUTTON.1 CHANGE_BUTTON.2 D2.2 D3.1 D7.2 D8.2 D9.2 D10.2 D11.2 D12.2 EPD_C1.1 EPD_C2.1 EPD_C5.1 EPD_C6.1 EPD_C7.1 EPD_C8.1 EPD_C9.1 EPD_C10.1 EPD_C11.1 EPD_C12.1 GND..TP GND.TP IC1.2 IC2.3 J1.G1 J1.G2 J1.G3 J1.G4 J1.P6 J2.A1 J2.A12 J2.B1 J2.B12 J2.MP1 J2.MP2 J2.MP3 J2.MP4 J3.8 J3.17 J3.MP1 J3.MP2 J4.1 MCP73831.2 R1_PWRUSB.1 R2_BAT.1 R2_USB1.2 R2_USB.2 R3.1 R5.1 RESET_BUTTON.1 RESET_BUTTON.2 SENSOR2.1 SENSOR2.5 SENSOR2.7 SJ1.1 U1.1 U1.28 U1.29_1 U1.29_2 U1.29_3 U1.29_4 U1.29_5 U1.29_6 U1.29_7 U1.29_8 U1.29_9 U2.1 U2.4 U2.6 U2.9 U3.13 U4.4 U4.9
GPIO8: R1.1 U1.10
I2C_PW [0.3mm]: C5.1 C6.1 R1_PINH.2 R2-PINH.2 SENSOR2.2 SENSOR2.6 SENSOR2.8 U1.17
INT_RTC: INT_RTC.TP R1_PINH1.1 U1.8 U3.3
IO/BOOT: BOOT_BUTTON.3 BOOT_BUTTON.4 C8.1 R_BOOT.1 U1.15
IO/CHANGE: C9.1 CHANGE_BUTTON.3 CHANGE_BUTTON.4 R_CHANGE.1 U1.23
MISO: D7.1 J1.P7 MISO.TP R10.1 U1.27 U4.2
MOSI: D8.1 J1.P3 J3.14 MOSI.TP R11.1 U1.7 U4.5
N$3: C_DELAY.1 IC2.5
N$4: D6.1 R_CAPACITOR.1
N$7: C1_BAT1.1 D1.1 IC1.1 IC1.3 Q1.2
N$8: J2.B5 R2_USB.1
N$10: J2.A5 R2_USB1.1
N$13: MCP73831.1 R1_BAT.2
N$14: C2.1 D3.2 D4.1
N$15: CHG_LED.C R1_BAT.1
N$16: MCP73831.5 R2_BAT.2
N$18: EPD_C6.2 J3.18
N$19: EPD_C7.2 J3.19
N$20: EPD_C8.2 J3.20
N$21: EPD_C1.2 J3.4
N$22: EPD_C10.2 J3.22
N$23: EPD_C12.2 J3.24
N$24: EPD_C2.2 J3.5
PREVGH: D5.1 EPD_C9.2 J3.21
PREVGL [0.3mm]: D4.2 EPD_C11.2 J3.23
RESE: J3.3 Q2.2 R4.2
RESE': R3.2 R4.1 SJ1.2
RESET: C7.1 IC2.1 R_RESET.1 RESET_BUTTON.3 RESET_BUTTON.4 U1.3
RTC_RST: U1.16 U3.4
RX: RX.TP U1.24
SCK: D9.1 J1.P5 J3.13 R12.1 SCK.TP U1.6 U4.6
SCL: J4.4 R2-PINH.1 SENSOR2.4 U1.20 U2.7 U3.16
SDA: J4.3 R1_PINH.1 SENSOR2.3 U1.19 U2.8 U3.15
SRC: C2.2 D5.2 L1.1 Q2.3
SS_SD: D12.1 J1.P2 R15.1 U1.4
TX: TP1.TP U1.25
USB_D+: D2.1 U1.14
USB_D-: D2.3 U1.13
VBAT [0.3mm]: C2_BAT.1 MCP73831.3 Q1.3 U2.2 U2.3 VBAT.TP
VBUS [0.3mm]: C1_BAT.1 C4_USB.1 C5_USB.1 CHG_LED.A D1.2 D2.5 MCP73831.4 PFMF.050.1.2 Q1.1 R1_PWRUSB.2 VBUS.TP
VRTC: C10_SUPERCAP.2 C11.1 R_CAPACITOR.2 U3.14
VUSB [0.3mm]: J2.A4 J2.A9 J2.B4 J2.B9 PFMF.050.1.1

## Tracks (layer width: path | path; a pad name or v marks a point on that pad's centre or on a via)
3V3  (via drill 0.3)
  Top 0.3: R1_PINH1.2 88.49,59.86 90.01,59.86 90.15,60 90.56,60 90.63,60.07 R2_PINH1.2 90.7,59.93 90.7,59.86 90.63,59.79 90.63,59.52 92.61,57.54 | 92.61,57.54 94.23,55.92 95.69,55.92 D6.2 | 82.6,37.77 82.6,42.76 81.91,43.45 81.91,45.74 88.63,52.45 90.08,52.45 90.29,52.66 90.29,53.84 U3.2 90.29,54.05 90.29,55.22 92.61,57.54 | 82.6,37.77 82.6,27.39 82.39,27.18 81.84,27.18 R_CL1.2 81.7,27.04 81.63,26.97 81.01,26.97 80.66,26.62 Q3.3 79.62,26.69 v78.93,26.69 | J4.2 165.29,18.8 155.94,18.8 134.75,39.99 134.12,39.99 C3.+ 133.98,40.06 133.43,40.06 132.05,41.44 127.96,41.44 IC1.5 127.2,41.44 126.44,42.2 124.43,42.2 120.06,37.84 119.37,37.84 C1_BAT2.1 119.23,37.77 82.6,37.77 | 3V3.TP 10.65,30.29 10.65,31.19 10.58,31.26 10.58,31.54 10.72,31.68 10.72,35.28 R1.2 10.58,35.35 10.58,36.04 9.4,37.22 9.4,41.1 U1.2 9.33,41.3 9.33,42 12.69,45.36 | 38.07,35.83 40.15,35.83 R12.2 40.29,35.9 43.27,35.9 R14.2 43.4,35.9 45.97,35.9 R11.2 46.11,35.9 46.59,35.9 v46.8,35.7 | 38.07,35.83 37.24,35.83 R15.2 | 36.65,56.09 39.25,53.49 39.32,53.49 39.6,53.22 39.6,52.94 39.73,52.8 U4.8 39.8,52.66 39.8,51.62 U4.7 | 36.65,56.09 36.55,56.19 36.55,56.75 R13.2 | 32.64,50.97 33.64,51.97 33.64,53.35 36.2,55.92 36.48,55.92 36.65,56.09 | 32.64,50.97 32.12,50.45 U4.3 31.98,50.38 31.36,50.38 31.29,50.45 27.69,50.45 R10.2 27.55,50.38 26.99,50.38 22.77,46.15 13.49,46.15 12.69,45.36 | 38.07,35.83 38.07,44.14 33.02,49.2 33.02,50.58 32.64,50.97 | 5.84,90.58 5.73,90.47 4.83,90.47 J1.P4 | 5.84,90.58 6.22,90.96 6.22,96.5 11.27,101.55 11.9,101.55 C1.1 12.04,101.55 21.87,101.55 26.92,106.61 28.1,106.61 R_BOOT.2 28.17,106.75 42.99,106.75 43.54,107.3 44.17,107.3 44.24,107.37 R_RESET.2 44.38,107.3 44.51,107.16 44.51,106.12 48.46,102.18 49.08,102.18 IC2.2 49.22,102.24 52.41,102.24 52.82,102.65 54.75,102.65 54.92,102.81 54.92,104.75 57.6,107.44 59.19,107.44 R_CHANGE.2
  Top 0.3: 12.69,45.36 7.19,50.86 7.19,57.58 7.12,57.65 7.12,58.89 7.19,58.96 7.19,59.24 6.77,59.66 6.77,89.64 5.84,90.58
  Bottom 0.3: v78.93,26.69 55.8,26.69 v46.8,35.7
32KHZ  (via drill 0.3)
  Top 0.15: U3.1 91.6,53.91 91.74,53.91 92.36,54.53 95.69,54.53 96.52,55.36 96.52,56.47 92.85,60.14 91.95,60.14 R2_PINH1.1 91.95,60.21 91.95,60.49 91.53,60.9 v91.4,60.9 | v26.65,48.65 23.46,45.46 21.87,45.46 18.27,41.86 18.27,41.17 U1.9
  Bottom 0.15: v26.65,48.65 26.15,49.15 26.15,52.09 34.96,60.9 v91.4,60.9
DN
  Top 0.15: 165.32,54.5 165.29,54.53 164.52,54.53 J2.A7 | 165.32,54.5 165.42,54.39 165.42,53.63 165.35,53.56 164.52,53.56 J2.B7 | 165.32,54.5 166.53,55.71 166.53,60.69 166.26,60.97 162.31,60.97 151.44,50.1 150.4,50.1 D2.4
DP
  Top 0.15: J2.A6 164.45,54.05 163.97,54.05 163.69,54.32 163.69,54.95 163.76,55.02 164.45,55.02 J2.B6 164.52,55.02 165.29,55.02 166.26,55.99 166.26,57.58 165.77,58.06 164.23,58.06 164.16,57.99 163.84,57.99 163.4,57.55 163.05,57.55 153.67,48.17 153.67,47.8 153.41,47.54 152.13,47.54 151.5,48.16 150.4,48.16 D2.6
EPD_3V3
  Top 0.3: EPD_3V3.TP 71.31,25.93 71.38,26 72.56,26 72.72,25.84 C4.2 75.29,25.86 76.64,25.86 76.78,25.72 77.61,25.72 Q3.2 77.75,25.72 86.96,25.72 91.5,21.19 | J3.16 83.22,14.51 83.71,14.51 J3.15 83.71,14.64 83.71,14.85 83.64,14.92 83.64,15.06 83.71,15.13 83.71,15.27 87.07,18.62 | 87.07,18.62 87.24,18.8 87.24,19.21 EPD_C5.2 | 91.5,21.19 91.47,21.15 91.47,18.87 91.05,18.45 87.24,18.45 87.07,18.62 | 91.5,21.19 95.48,25.17 110.02,25.17 L1.2
EPD_3V3_C  (via drill 0.3)
  Top 0.3: 81.01,28.29 80.32,27.59 77.68,27.59 Q3.1 | 81.01,28.29 81.63,28.29 81.7,28.36 R_CL1.1 | 20.83,59.79 20.83,60.62 20.97,60.76 20.97,61.04 20.9,61.11 20.9,61.94 EPD_3V3_C.TP | 20.83,59.79 20.83,58.69 U1.18 | v25.47,58.2 53.03,58.2 78.03,33.2 78.03,31.33 80.94,28.42 81.01,28.29 | v21.04,59.79 20.83,59.79
  Bottom 0.3: v25.47,58.2 22.63,58.2 v21.04,59.79
EPD_BUSY  (via drill 0.3)
  Top 0.15: v86.2,13.67 86.55,13.67 86.76,13.88 86.76,14.02 86.69,14.09 86.69,14.44 J3.9 | EPD_BUSY.TP 10.3,65.4 10.3,59.66 10.58,59.38 10.58,58.69 U1.26 10.65,58.62 10.65,57.93 13.42,55.16 v14.32,55.16
  Bottom 0.15: v86.2,13.67 60.58,13.67 19.1,55.16 v14.32,55.16
EPD_CS  (via drill 0.3)
  Top 0.15: U1.11 20.83,41.1 20.83,37.36 20.69,37.22 20.69,36.32 EPD_CS.TP 20.76,36.32 29.69,36.32 36.83,29.19 40.57,29.19 42.23,30.85 42.23,31.19 42.78,31.75 43.13,31.75 D11.1 | v85.23,15.27 85.23,14.51 J3.12 | v44.44,31.47 43.47,31.47 43.2,31.75 D11.1 | R14.1 43.4,34.52 43.4,32.02 43.2,31.82 D11.1
  Bottom 0.15: v85.23,15.27 85.09,15.27 82.41,17.95 76.81,17.95 75.68,19.08 56.84,19.08 v44.44,31.47
EPD_DC
  Top 0.15: 12.45,36.11 11.55,36.11 11.34,35.9 11.41,35.83 11.41,34.73 11.34,34.66 11.34,31.68 29.69,13.33 85.23,13.33 85.72,13.81 85.72,14.44 J3.11 | 12.45,36.11 13.28,35.28 EPD_DC.TP | U1.5 13.21,41.1 13.21,36.94 12.45,36.18 12.45,36.11
EPD_RST  (via drill 0.3)
  Top 0.15: v85.86,15.27 86.13,15.27 86.2,15.2 86.2,14.51 J3.10 | v17.16,57.51 17.16,58.48 17.02,58.62 U1.21 | v15.5,61.04 15.5,61.18 16.4,62.08 EPD_RST.TP
  Bottom 0.15: v85.86,15.27 85.37,14.78 59.89,14.78 v17.16,57.51 17.16,57.58 15.5,59.24 v15.5,61.04
FLASH_CS  (via drill 0.3)
  Top 0.15: U4.1 32.05,52.87 32.05,53.08 35.23,56.26 35.23,56.75 R13.1 35.23,56.89 v34.47,56.89 | v34.47,58.76 34.75,58.76 35.16,59.17 35.16,59.52 D10.1 | v28.38,48.65 22.08,42.34 22.08,41.17 U1.12
  Bottom 0.15: v34.47,58.76 v34.47,56.89 34.47,56.82 28.38,50.72 v28.38,48.65
GDR
  Top 0.3: 92.19,18.62 92.3,18.73 92.3,19.15 92.36,19.21 R5.2 | 92.19,18.62 90.22,16.65 90.22,15.2 90.15,15.13 90.15,14.92 90.22,14.85 90.22,14.51 J3.2 | 92.19,18.62 93.68,17.14 98.18,17.14 Q2.1
GND  (via drill 0.35)
  Top 0.3: U1.29_5 13.84,48.44 13.84,49.62 U1.29_6 | 154.3,8.98 v154.3,9 | v33.8,51.2 v33.8,49.2 | U1.29_4 U1.29_1 | J2.A12 J2.B1 | v12,42.8 13.3,42.8 v13.4,42.9
  Bottom 0.3: v154.3,9 155.2,8.1 v155.9,8.1 | v90.5,21.3 v92.7,21.3 | v77,18.4 77,19.7 77.8,20.5 v77.8,21.5 | v125.1,53.1 125.1,53.7 v126.1,54.7 | v164.9,47.2 v165.9,46.2 | v142.9,18.3 143.6,19 v143.6,19.6 | v11.1,45.7 v11.1,48.4 | v33.8,49.2 32.8,48.2 v32.8,48.1 | v53.1,101.9 v53.1,104.1 | v13.7,100.3 v13.7,102.5 | v163.5,60.4 163.4,60.5 v163.4,61.8 | v163.24,57.1 163.6,57.1 163.6,57.5 v163.1,58 v163.1,58.01 | v52.1,56.9 52.7,57.5 v55.6,57.5
  other vias: 31.1,52.3 31.4,58.9
  pour Top: 6.76,40.76 6.74,40.74 6.72,40.72 0.18,40.72 0.18,0.18 75.32,0.18 75.32,10.12 75.34,10.14 75.36,10.16 75.38,10.18 93.82,10.18 93.84,10.16 93.86,10.14 93.88,10.12 93.88,0.18 170.02,0.18 170.02,67.02 92.08,67.02 92.06,67.04 92.04,67.06 92.02,67.08 92.02,111.02 66.78,111.02 66.78,110.38 66.76,110.36 66.74,110.34 66.72,110.32 21.28,110.32 21.26,110.34 21.24,110.36 21.22,110.38 21.22,111.02 0.08,111.02 0.08,59.08 6.72,59.08 6.74,59.06 6.76,59.04 6.78,59.02 6.78,40.78
  pour Bottom: 6.76,40.76 6.74,40.74 6.72,40.72 0.18,40.72 0.18,0.18 75.32,0.18 75.32,10.12 75.34,10.14 75.36,10.16 75.38,10.18 93.82,10.18 93.84,10.16 93.86,10.14 93.88,10.12 93.88,0.18 170.02,0.18 170.02,67.02 92.08,67.02 92.06,67.04 92.04,67.06 92.02,67.08 92.02,111.02 66.78,111.02 66.78,110.38 66.76,110.36 66.74,110.34 66.72,110.32 21.28,110.32 21.26,110.34 21.24,110.36 21.22,110.38 21.22,111.02 0.08,111.02 0.08,59.08 6.72,59.08 6.74,59.06 6.76,59.04 6.78,59.02 6.78,40.78
GPIO8
  Top 0.15: R1.1 12.04,35.28 12.04,32.58 11.9,32.44 11.9,31.54 12.73,30.71 13.84,30.71 19.24,36.11 19.24,40.82 19.51,41.1 U1.10
I2C_PW  (via drill 0.3)
  Top 0.3: C5.1 154.83,6.54 153.24,6.54 C6.1 153.03,6.54 151.5,6.54 R1_PINH.2 151.37,6.54 149.64,6.54 R2-PINH.2 149.43,6.54 148.94,6.54 144.86,10.63 144.86,18.8 144.79,18.87 SENSOR2.8 144.58,18.87 143.33,18.87 142.74,19.46 | 142.74,19.46 142.5,19.7 141.74,19.7 SENSOR2.2 141.6,19.7 141.12,19.7 141.05,19.77 140.98,19.77 v140.84,19.91 | SENSOR2.6 144.58,20.46 143.71,20.46 143.07,19.82 143.07,19.78 142.74,19.46 | v76.99,33.48 52.75,57.72 34.75,57.72 34.47,57.44 22.49,57.44 22.08,57.86 22.08,58.62 U1.17
  Bottom 0.3: v76.99,33.48 127.27,33.48 v140.84,19.91
INT_RTC  (via drill 0.3)
  Top 0.15: 17.02,39.99 17.02,39.09 17.23,38.88 17.23,37.63 INT_RTC.TP | 17.02,39.99 17.02,41.1 U1.8 | R1_PINH1.1 88.49,58.48 88.49,55.57 88.97,55.09 88.97,53.91 U3.3 88.97,53.84 88.97,53.35 86.51,50.9 v82.19,50.9 | v28.38,47.54 v25.47,44.63 | v17.09,39.99 17.02,39.99
  Bottom 0.15: v17.09,39.99 20.83,39.99 v25.47,44.63 | v82.19,50.9 62.85,50.9 62.7,50.75 31.59,50.75 v28.38,47.54
IO/BOOT  (via drill 0.3)
  Top 0.15: R_BOOT.1 28.1,108.06 28.1,108.41 26.72,109.79 25.89,109.79 BOOT_BUTTON.3 25.75,109.79 22.35,109.79 BOOT_BUTTON.4 22.28,109.72 21.73,109.72 19.93,107.92 | 19.93,107.92 19.1,107.92 C8.1 | v24.64,60.07 24.64,58.69 U1.15 | v24.64,78.91 24.64,103.15 v24.43,103.35 | v20,107.78 19.93,107.85 19.93,107.92
  Bottom 0.15: v24.64,78.91 v24.64,60.07 | v20,107.78 v24.43,103.35
IO/CHANGE
  Top 0.15: C9.1 68.2,108.82 67.23,108.82 66.33,109.72 65.7,109.72 CHANGE_BUTTON.3 65.63,109.79 62.24,109.79 CHANGE_BUTTON.4 62.17,109.72 61.55,109.72 60.58,108.75 60.02,108.75 | 60.02,108.75 59.26,108.75 R_CHANGE.1 | 60.02,108.75 60.02,103.77 17.02,60.76 15.84,60.76 14.46,59.38 14.46,58.69 U1.23
MISO  (via drill 0.3)
  Top 0.15: 3.9,94.04 3.86,94.07 3.86,98.44 4.76,99.34 4.76,99.96 MISO.TP | 3.9,94.04 4.14,93.8 4.97,93.8 J1.P7 | U4.2 31.98,51.62 31.29,51.62 31.15,51.76 27.69,51.76 R10.1 27.69,51.83 26.99,51.83 24.15,54.67 12.66,54.67 9.4,57.93 9.4,58.62 U1.27 9.4,58.69 9.47,58.76 9.47,61.11 D7.1 9.47,61.18 9.47,61.52 8.92,62.08 v8.92,87.49 | v3.86,94 3.9,94.04
  Bottom 0.15: v3.86,94 3.86,92.55 v8.92,87.49
MOSI  (via drill 0.3)
  Top 0.15: J3.14 84.19,14.44 84.19,13.81 83.99,13.61 64.66,13.61 46.52,31.75 46.11,31.75 D8.1 46.04,31.82 45.97,31.89 45.97,34.59 R11.1 46.04,34.66 46.52,34.66 47.28,35.42 47.28,43.59 42.71,48.16 42.71,48.78 42.37,49.13 MOSI.TP 42.3,49.2 41.12,49.2 40.98,49.06 39.8,49.06 U4.5 39.73,49.06 39.11,49.06 39.04,49.13 v38.9,49.13 | 16.23,42.38 19.58,45.74 23.12,45.74 26.51,49.13 v31.01,49.13 | 16.23,42.38 15.77,41.93 15.77,41.17 U1.7 | v6.15,89.02 5.87,89.29 5.04,89.29 J1.P3 | 16.23,42.38 v16.12,42.48
  Bottom 0.15: v38.9,49.13 38.9,49.53 38.7,49.73 31.61,49.73 v31.01,49.13 | v6.15,89.02 5.84,88.71 5.73,88.82 5.73,60.56 13.21,53.08 13.21,52.99 14.2,52 16.2,52 18,50.2 18,47.6 16.9,46.5 13.99,46.5 13.27,45.78 13.27,45.33 v16.12,42.48
N$1  (via drill 0.35)
  other vias: 17.3,42.5
N$3
  Top 0.15: 51.99,103.15 IC2.5 52.11,103.28 C_DELAY.1
N$4
  Top 0.15: R_CAPACITOR.1 94.37,45.74 94.37,52.11 95.69,53.42 95.69,53.77 D6.1
N$7  (via drill 0.3)
  Top 0.15: 125.95,40.96 125.95,41.03 125.67,41.3 125.12,41.3 125.05,41.37 IC1.1 | 125.95,40.96 125.95,39.92 125.61,39.57 125.05,39.57 IC1.3 | C1_BAT1.1 127.06,45.25 128.93,45.25 129.14,45.46 D1.1 129.21,45.46 129.48,45.46 v129.9,45.88 | v136.48,48.85 137.59,48.85 Q1.2 | v125.88,40.96 125.95,40.96
  Bottom 0.15: v136.48,48.85 132.88,48.85 v129.9,45.88 129.9,45.81 125.88,41.79 v125.88,40.96
N$8  (via drill 0.3)
  Top 0.15: v162.72,53.22 156.77,47.26 153.17,47.26 151.71,45.81 151.71,45.25 R2_USB.1 | v165.42,55.92 165.29,56.05 164.52,56.05 J2.B5
  Bottom 0.15: v165.42,55.92 v162.72,53.22
N$10
  Top 0.15: R2_USB1.1 151.78,42.97 151.78,38.26 152.13,37.91 156.56,37.91 166.53,47.88 166.53,51.76 165.29,53.01 164.52,53.01 J2.A5
N$13  (via drill 0.3)
  Top 0.15: v131.77,51.35 131.63,51.48 131.01,51.48 R1_BAT.2 | v131.91,52.94 131.7,53.15 130.94,53.15 MCP73831.1
  Bottom 0.15: v131.77,51.35 131.77,52.8 v131.91,52.94
N$14  (via drill 0.3)
  Top 0.15: C2.1 94.65,32.23 93.96,32.23 90.77,29.05 90.56,29.05 D3.2 90.49,29.05 90.15,29.39 89.04,29.39 v87.86,30.57 | v82.05,32.65 80.59,32.65 D4.1
  Bottom 0.15: v82.05,32.65 85.79,32.65 v87.86,30.57
N$15
  Top 0.15: CHG_LED.C 129.48,50.1 130.87,50.1 130.94,50.17 R1_BAT.1
N$16
  Top 0.15: R2_BAT.2 127.48,51.28 127.48,52.31 128.31,53.15 MCP73831.5
N$18
  Top 0.15: J3.18 82.19,14.51 82.19,14.92 82.25,14.99 82.25,15.13 82.19,15.2 82.19,15.61 85.51,18.94 85.51,19.21 EPD_C6.2
N$19
  Top 0.15: J3.19 81.7,14.51 81.7,16.79 83.85,18.94 83.85,19.21 EPD_C7.2
N$20
  Top 0.15: J3.20 81.22,14.51 81.22,18.04 82.12,18.94 82.12,19.21 EPD_C8.2
N$21  (via drill 0.3)
  Top 0.15: v89.25,17.62 89.25,14.51 J3.4 | v89.73,19.84 90.29,19.28 90.43,19.28 EPD_C1.2
  Bottom 0.15: v89.25,17.62 89.25,19.35 v89.73,19.84
N$22
  Top 0.15: J3.22 80.25,14.51 80.25,17.41 78.72,18.94 78.72,19.21 EPD_C10.2
N$23
  Top 0.15: J3.24 79.21,14.51 79.21,15.13 75.74,18.59 75.61,18.59 75.19,19.01 75.19,19.28 EPD_C12.2
N$24  (via drill 0.3)
  Top 0.15: v88.69,17.9 88.69,14.51 J3.5 | v88.14,19.01 88.35,19.21 88.9,19.21 EPD_C2.2
  Bottom 0.15: v88.69,17.9 88.69,18.45 v88.14,19.01
PREVGH  (via drill 0.3)
  Top 0.15: J3.21 80.73,14.51 80.73,18.94 80.45,19.21 EPD_C9.2 80.73,19.01 v81.28,19.56 | v88.49,30.57 88.49,32.58 D5.1
  Bottom 0.15: v88.49,30.57 88.49,26.76 v81.28,19.56
PREVGL
  Top 0.3: J3.23 79.69,14.51 79.69,14.92 79.83,15.06 79.83,15.13 77.66,17.3 77.66,19.73 76.93,20.45 EPD_C11.2 76.78,20.6 76.78,21.08 76.37,21.5 73.67,21.5 69.79,25.38 69.79,26.49 75.95,32.65 76.99,32.65 D4.2
RESE
  Top 0.15: J3.3 89.73,14.44 89.73,13.81 90.22,13.33 97.28,13.33 97.42,13.19 R4.2 97.35,13.33 98.25,14.23 Q2.2
RESE'
  Top 0.15: R4.1 97.49,11.87 98.53,11.87 100.4,10 100.88,10 100.95,9.93 R3.2 100.95,10 104.21,10 SJ1.2
RESET  (via drill 0.3)
  Top 0.15: C7.1 53.1,108.69 52.48,108.69 51.44,109.72 50.81,109.72 RESET_BUTTON.3 50.75,109.79 47.35,109.79 RESET_BUTTON.4 47.28,109.72 46.66,109.72 45.69,108.75 | 45.69,108.75 44.3,108.75 R_RESET.1 | 45.69,108.75 45.69,107.99 49.15,104.53 49.15,103.15 IC2.1 49.08,103.21 v48.32,103.21 | v13.7,45.6 10.65,42.55 10.65,41.17 U1.3
  Bottom 0.15: v48.32,103.21 13.6,68.49 13.6,54.3 15.6,52.3 16.9,52.3 19,50.2 19,47.4 17.62,46.02 14.12,46.02 v13.7,45.6
RTC_RST
  Top 0.15: U1.16 23.39,58.69 23.39,59.45 24.8,60.86 81.33,60.86 87.72,54.46 87.72,53.91 U3.4
RX
  Top 0.15: U1.24 13.21,58.69 13.21,64.3 13.14,64.37 13.14,65.4 RX.TP
SCK  (via drill 0.3)
  Top 0.15: SCK.TP 14.74,34.45 14.74,35.63 14.46,35.9 14.46,41.1 U1.6 14.39,41.17 14.39,41.95 14.45,42.01 14.45,43.79 14.18,44.06 v14.18,45.04 | v3.86,91.58 4.97,91.58 J1.P5 | v13.21,53.7 15.2,53.7 16.17,52.73 v16.18,52.73 | v84.47,15.27 84.61,15.27 84.75,15.13 84.75,14.51 J3.13 | 41.26,32.65 v42.64,32.65 | 41.26,32.65 40.36,31.75 40.01,31.75 D9.1 | 41.26,32.65 41.26,32.72 40.15,33.83 40.15,34.59 R12.1 40.08,34.59 39.87,34.8 v38.83,34.8 | v39.8,49.68 39.8,50.31 U4.6
  Bottom 0.15: v3.86,91.58 4.21,91.58 13.21,82.58 v13.21,53.7 | v84.47,15.27 60.02,15.27 v42.64,32.65 42.64,32.72 39.8,35.56 v39.8,49.68 | v38.83,34.8 28.52,45.11 14.25,45.11 v14.18,45.04 14.88,45.75 18.28,45.75 19.6,47.06 19.6,50.5 17.38,52.72 16.2,52.72 v16.18,52.73
SCL  (via drill 0.3)
  Top 0.15: 142.68,21.53 142.43,21.29 141.74,21.29 SENSOR2.4 | 142.68,21.53 143.19,22.05 145.27,22.05 149.57,17.76 149.57,7.86 R2-PINH.1 149.64,7.86 149.98,7.86 150.67,7.16 150.74,7.16 150.81,7.23 151.92,7.23 151.99,7.16 152.47,7.16 152.54,7.23 153.65,7.23 153.86,7.44 153.86,7.95 154.46,8.55 155.71,8.55 158.16,8.55 166.74,17.14 166.74,20.11 166.12,20.74 165.35,20.74 J4.4 | U2.7 92.71,41.86 92.71,42.2 92.78,42.27 92.78,42.41 91.6,43.59 91.6,44.56 U3.16 91.53,43.87 91.12,43.87 90.91,43.66 v90.91,43.45 | v31.63,56.54 19.65,56.54 18.27,57.93 18.27,58.62 U1.20 | v142.64,21.57 142.68,21.53
  Bottom 0.15: v31.63,56.54 34.33,59.24 75.12,59.24 v90.91,43.45 119.58,43.45 141.46,21.57 v142.64,21.57
SDA  (via drill 0.3)
  Top 0.15: 155.83,11.98 160.85,17 166.19,17 166.46,17.28 166.46,19.42 166.19,19.7 165.42,19.7 165.35,19.77 J4.3 | 155.83,11.98 152.2,8.34 152.2,8.13 151.92,7.86 151.44,7.86 R1_PINH.1 | 140.84,21.64 140.84,20.67 140.98,20.53 141.67,20.53 SENSOR2.3 | 140.84,21.64 141.53,22.33 145.48,22.33 155.83,11.98 | 90.39,43.28 90.29,43.38 90.29,44.56 U3.15 | 90.39,43.28 91.81,41.86 92.23,41.86 U2.8 | v34.54,56.19 33.71,57.02 20.48,57.02 19.58,57.93 19.58,58.62 U1.19 | 90.39,43.28 v90.29,43.17 | v140.77,21.64 140.84,21.64
  Bottom 0.15: v140.77,21.64 139.66,21.64 118.33,42.97 90.56,42.97 90.36,43.17 v90.29,43.17 82.61,50.85 82.61,51.07 77.49,56.19 v34.54,56.19
SRC
  Top 0.15: Q2.3 100.4,16.51 103.31,16.51 107.39,20.6 110.03,20.6 L1.1 112.7,23.23 113.07,23.23 113.07,25.79 108.02,30.85 94.86,30.85 94.72,30.99 C2.2 94.65,30.99 93.96,30.99 91.05,28.08 89.32,28.08 85.02,32.37 85.02,32.58 D5.2
SS_SD  (via drill 0.3)
  Top 0.15: D12.1 37.45,31.68 37.17,31.96 37.17,34.45 R15.1 37.1,34.45 36.76,34.45 v36.34,34.86 | v12.73,39.64 11.97,40.4 11.97,41.1 U1.4 | v6.22,60.69 6.08,60.83 6.08,87.84 5.66,88.26 5.46,88.26 J1.P2 | v12.73,52.72 v12.73,54.19
  Bottom 0.15: v36.34,34.86 21.59,34.86 16.81,39.64 v12.73,39.64 12.73,45.47 12.7,45.5 12.7,45.6 13.9,46.8 16.3,46.8 17,47.5 17,50.1 15.4,51.7 13.4,51.7 12.73,52.37 v12.73,52.72 | v12.73,54.19 v6.22,60.69
TX
  Top 0.15: U1.25 11.9,58.69 11.9,61.59 11.76,61.73 11.76,62.63 TP1.TP
USB_D+  (via drill 0.3)
  Top 0.15: v151.78,49.2 151.78,48.58 152.13,48.23 152.82,48.23 D2.1 | v28.72,46.57 28.72,45.94 24.64,41.86 24.64,41.17 U1.14
  Bottom 0.15: v151.78,49.2 151.78,49.41 151.85,49.48 151.85,49.75 142.09,59.52 33.99,59.52 27.89,53.42 27.89,47.4 v28.72,46.57
USB_D-  (via drill 0.3)
  Top 0.15: v151.37,49.62 151.85,50.1 152.82,50.1 D2.3 | v84.82,50.17 84.72,50.27 v72.73,50.27 | v29,47.54 23.32,41.86 23.32,41.17 U1.13
  Bottom 0.15: v151.37,49.62 85.37,49.62 v84.82,50.17 | v72.73,50.27 31.53,50.27 29,47.75 v29,47.54
VBAT
  Top 0.3: Q1.3 136.62,51 135.85,51 131.77,55.09 130.94,55.09 MCP73831.3 130.8,55.09 129.83,55.09 129.07,55.85 123.94,55.85 | U2.2 92.78,39.85 93.2,39.85 U2.3 93.27,39.71 93.27,39.37 93.33,39.3 93.33,39.23 93.2,39.09 93.4,38.88 104.76,38.88 120.27,54.39 123.73,54.39 123.8,54.46 C2_BAT.1 123.94,54.6 123.94,55.85 | 123.94,55.85 123.94,58.13 123.87,58.2 123.87,59.1 VBAT.TP
VBUS
  Top 0.3: 149.36,49.13 150.33,49.13 D2.5 | 149.36,49.13 148.39,49.13 C5_USB.1 | 148.32,43.24 148.32,40.27 148.46,40.13 PFMF.050.1.2 | 148.32,43.24 148.32,44.07 C4_USB.1 148.46,44.14 148.94,44.14 149.36,44.56 149.36,49.13 | 135.02,48.65 133.95,47.57 | 133.95,47.57 131.91,45.53 131.28,45.53 D1.2 | 135.02,48.65 135.44,48.65 135.65,48.85 Q1.1 | 133.95,47.57 137.72,43.8 137.72,43.31 R1_PWRUSB.2 137.86,43.24 148.32,43.24 | 129.48,52.45 129.48,53.77 128.58,54.67 128.58,54.95 128.38,55.16 MCP73831.4 128.17,55.09 127.34,55.09 125.88,53.63 124.7,53.63 123.8,52.73 123.8,52.31 C1_BAT.1 123.73,52.18 121.17,52.18 121.1,52.25 120.27,52.25 VBUS.TP | 129.48,52.45 129.48,51.62 CHG_LED.A | 129.48,52.45 131.42,52.45 132.32,51.55 132.32,51.42 134.95,48.78 135.02,48.65
VRTC
  Top 0.15: C10_SUPERCAP.2 97.35,46.15 96.94,46.15 95.2,44.42 94.37,44.42 R_CAPACITOR.2 94.3,44.42 93.47,44.42 91.88,46.01 89.94,46.01 89.04,45.11 89.04,44.63 U3.14 88.97,44.56 88.97,43.38 88.9,43.31 88.9,40.13 C11.1
VUSB
  Top 0.3: J2.A4 164.52,51.76 164.52,52.04 J2.B9 164.39,51.97 163.62,51.97 | J2.A9 164.52,56.82 164.52,56.61 J2.B4 164.39,56.61 163.62,56.61 163.28,56.26 163.28,52.31 163.62,51.97 | 163.62,51.97 163.55,51.83 154.21,42.48 154.21,41.86 153.03,40.68 153.03,40.13 PFMF.050.1.1